# Altium PCB VT 12S RHS V0.1.PcbDoc
Units mm, origin at the board's own origin, x right, y up, seen from the top; angles counter-clockwise.
Board outline 166.65 x 174.65 mm, 2 copper layers (Top Layer, Bottom Layer), stack 0.049 mm thick; 7 components, 6 nets, 19 pads, 36 vias.
Unrouted connection lines stored in the file: 13.
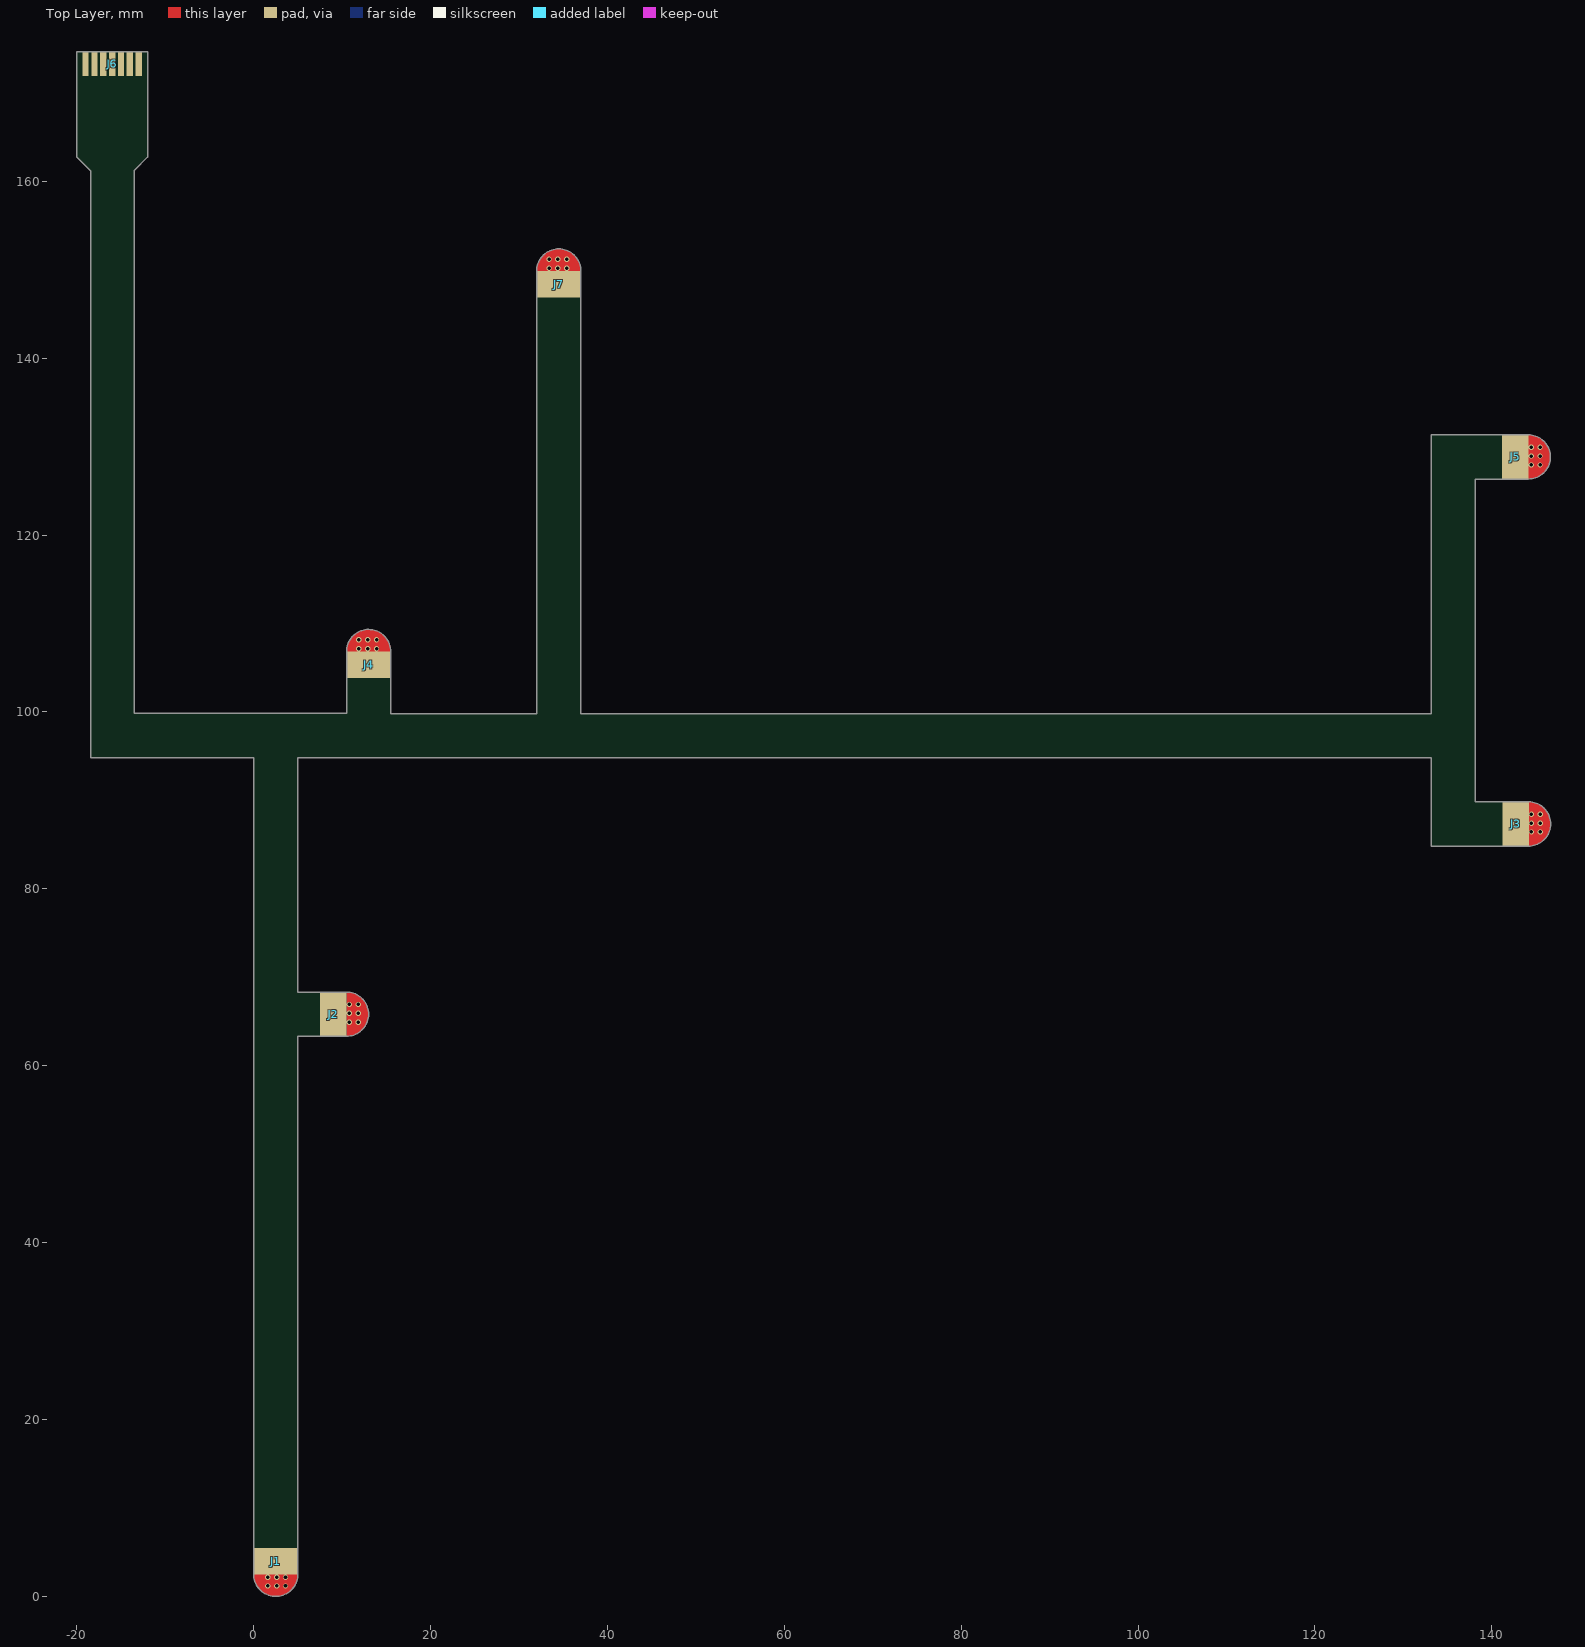
[diagram p0: Top Layer view]
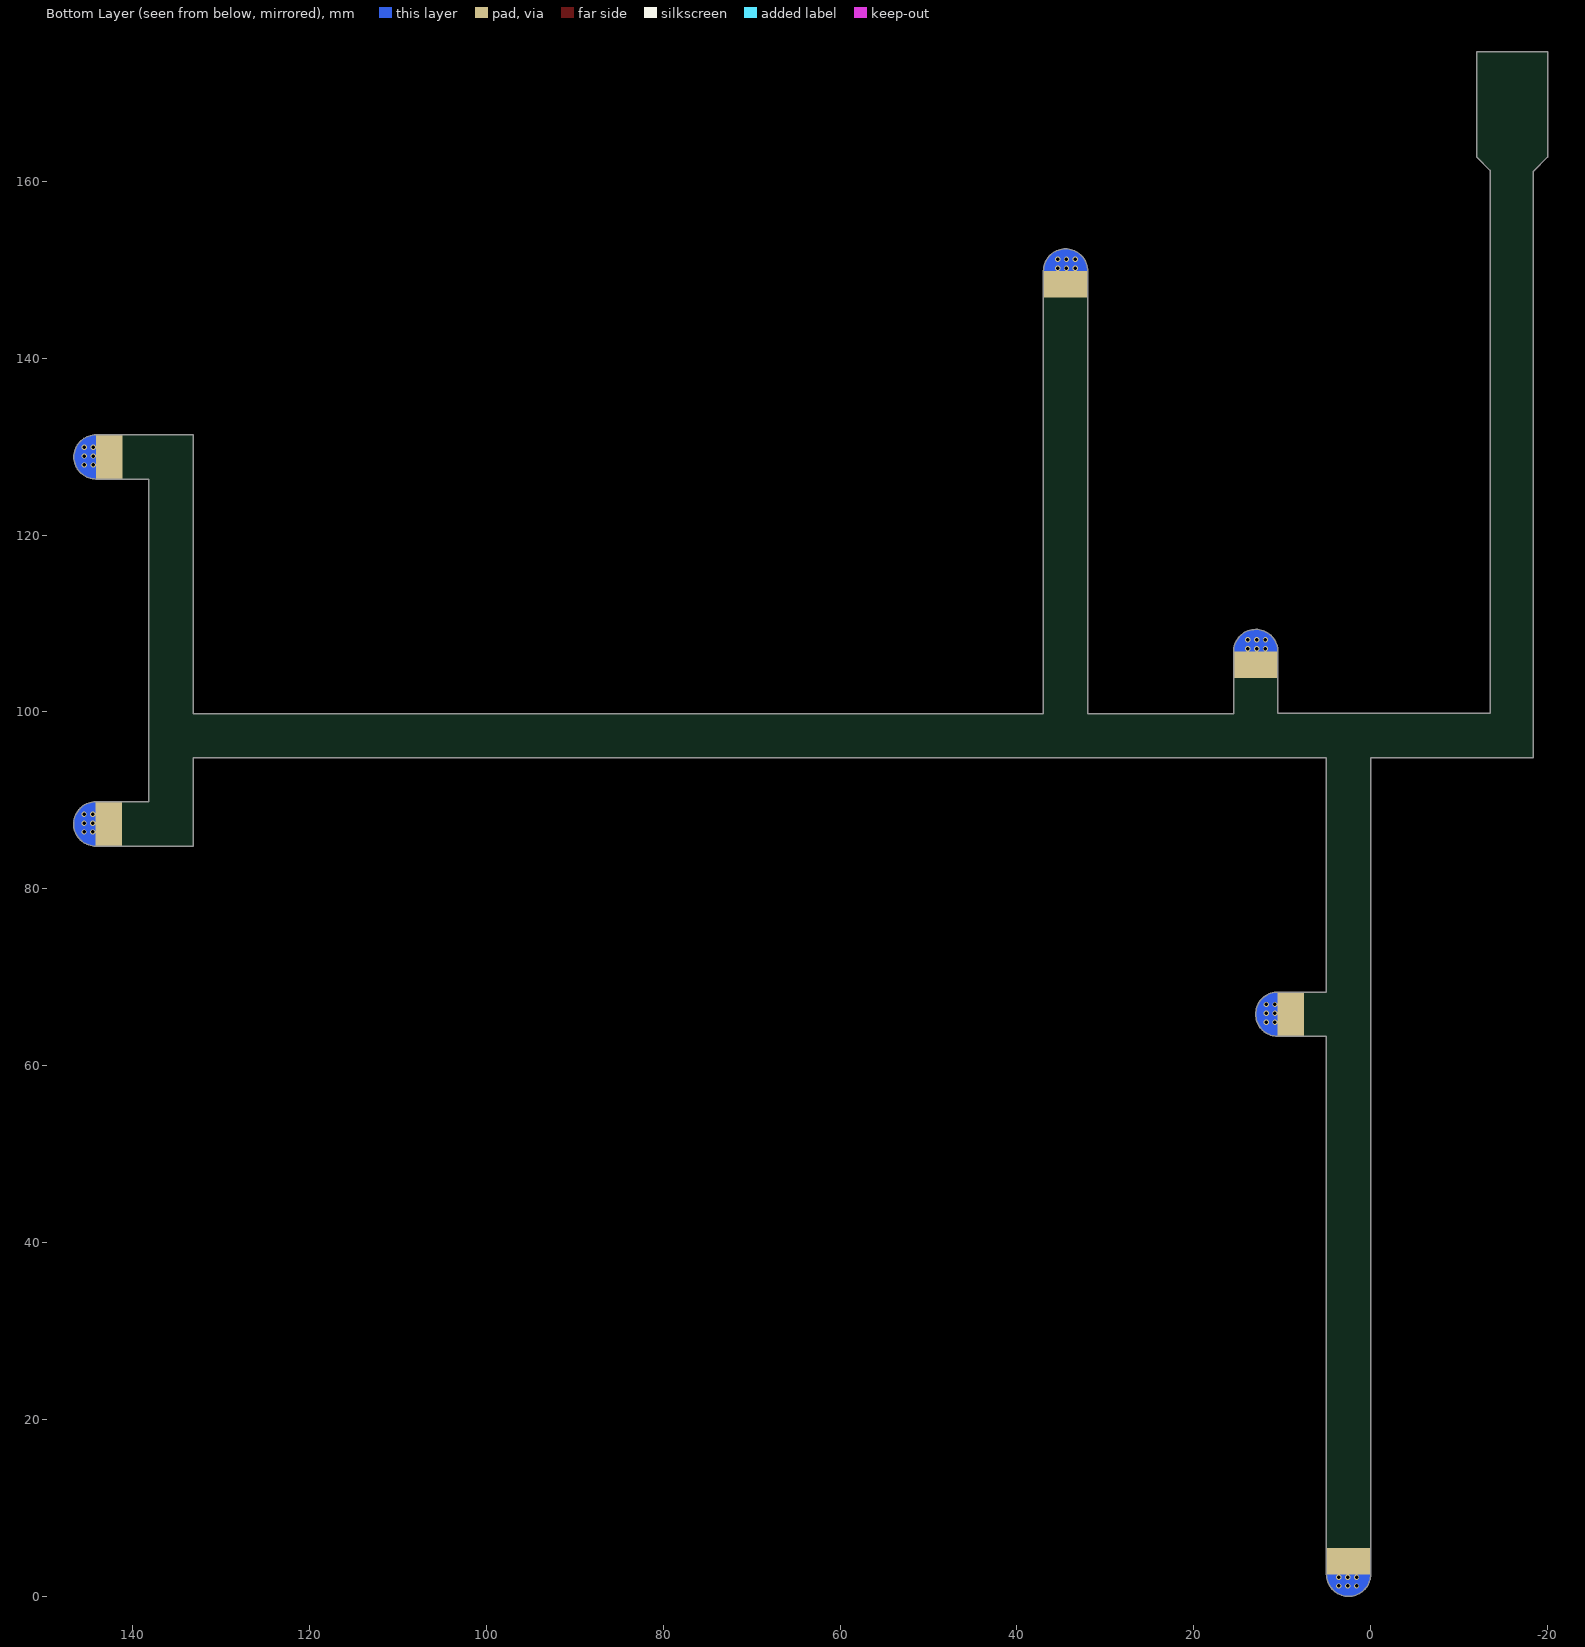
[diagram p1: Bottom Layer view, seen from below]

## Layer stack, top to bottom
Top Solder: solder mask 0.0275, Polyimide, Dk 3.5
Top Layer: signal copper 0.012
Dielectric 1: dielectric 0.025, Polyimide, Dk 3.3
Bottom Layer: signal copper 0.012
Bottom Solder: solder mask 0.0275, Polyimide, Dk 3.5

## Board outline
0,2.5 0,5.475 0,94.82 -18.4,94.82 -18.4,160.9 -18.4,161.125 -20,162.725 -20,174.65 -12,174.65 -12,162.725 -13.5,161.225 -13.5,161.19 -13.5,99.82 10.5,99.82 10.5,106.825 cw(c13,106.825) 13,109.325 cw(c13,106.825) 15.5,106.825 15.5,103.85 15.5,99.8 32,99.8 32,146.875 32,149.85 cw(c34.5,149.85) 34.5,152.35 cw(c34.5,149.85) 37,149.85 37,146.875 37,99.8 133.14,99.8 133.14,131.325 144.125,131.325 cw(c144.125,128.825) 146.625,128.825 cw(c144.125,128.825) 144.125,126.325 138.14,126.325 138.14,89.825 144.15,89.825 cw(c144.15,87.325) 146.65,87.325 cw(c144.15,87.325) 144.15,84.825 133.15,84.825 133.15,94.82 5,94.82 5,68.325 10.5,68.325 cw(c10.5,65.825) 13,65.825 cw(c10.5,65.825) 10.5,63.325 5,63.325 5,5.475 5,2.5 cw(c2.5,2.5) 2.5,0 cw(c2.5,2.5)
board region Flex: -5.225,99.82 10.5,99.82 10.5,106.825 10.5,107.071 10.596,107.554 10.785,108.009 11.058,108.419 11.406,108.767 11.816,109.04 12.271,109.229 12.754,109.325 13,109.325 13.246,109.325 13.729,109.229 14.184,109.04 14.594,108.767 14.942,108.419 15.215,108.009 15.404,107.554 15.5,107.071 15.5,106.825 15.5,103.85 15.5,99.8 32,99.8 32,146.875 32,149.85 32,150.096 32.096,150.579 32.285,151.034 32.558,151.444 32.906,151.792 33.316,152.065 33.771,152.254 34.254,152.35 34.5,152.35 34.746,152.35 35.229,152.254 35.684,152.065 36.094,151.792 36.442,151.444 36.715,151.034 36.904,150.579 37,150.096 37,149.85 37,146.875 37,99.8 133.14,99.8 133.14,131.325 144.125,131.325 144.371,131.325 144.854,131.229 145.309,131.04 145.719,130.767 146.067,130.419 146.34,130.009 146.529,129.554 146.625,129.071 146.625,128.825 146.625,128.579 146.529,128.096 146.34,127.641 146.067,127.231 145.719,126.883 145.309,126.61 144.854,126.421 144.371,126.325 144.125,126.325 138.14,126.325 138.14,89.825 144.15,89.825 144.396,89.825 144.879,89.729 145.334,89.54 145.744,89.267 146.092,88.919 146.365,88.509 146.554,88.054 146.65,87.571 146.65,87.325 146.65,87.079 146.554,86.596 146.365,86.141 146.092,85.731 145.744,85.383 145.334,85.11 144.879,84.921 144.396,84.825 144.15,84.825 133.15,84.825 133.15,94.82 5,94.82 5,68.325 10.5,68.325 10.746,68.325 11.229,68.229 11.684,68.04 12.094,67.767 12.442,67.419 12.715,67.009 12.904,66.554 13,66.071 13,65.825 13,65.579 12.904,65.096 12.715,64.641 12.442,64.231 12.094,63.883 11.684,63.61 11.229,63.421 10.746,63.325 10.5,63.325 5,63.325 5,5.475 5,2.5 5,2.254 4.904,1.771 4.715,1.316 4.442,0.906 4.094,0.558 3.684,0.285 3.229,0.096 2.746,0 2.5,0 2.254,0 1.771,0.096 1.316,0.285 0.906,0.558 0.558,0.906 0.285,1.316 0.096,1.771 0,2.254 0,2.5 0,5.475 0,94.82 -5.225,94.82
board region Anchor: -5.225,94.82 -18.4,94.82 -18.4,160.9 -18.4,161.125 -20,162.725 -20,174.65 -12,174.65 -12,162.725 -13.5,161.225 -13.5,161.19 -13.5,99.82 -5.225,99.82

## Design rules (kind name [scope] priority, off if disabled: settings)
Clearance [All] p1: gap=0.152 ignorepadtopadclearanceinfootprint=FALSE
DiffPairsRouting [All] p1: maxlimit=0.254 minlimit=0.254 mostfreqgap=0.254 toplayer_minwidth=0.381 toplayer_maxwidth=0.381 toplayer_prefwidth=0.381 bottomlayer_minwidth=0.381 bottomlayer_maxwidth=0.381 bottomlayer_prefwidth=0.381 substack1={34D787CE-2DC0-4B00-A6B0-2647A249037B} toplayer_{34d787ce-2dc0-4b00-a6b0-2647a249037b}_minwidth=0.381 toplayer_{34d787ce-2dc0-4b00-a6b0-2647a249037b}_maxwidth=0.381 toplayer_{34d787ce-2dc0-4b00-a6b0-2647a249037b}_prefwidth=0.381 bottomlayer_{34d787ce-2dc0-4b00-a6b0-2647a249037b}_minwidth=0.381 bottomlayer_{34d787ce-2dc0-4b00-a6b0-2647a249037b}_maxwidth=0.381 bottomlayer_{34d787ce-2dc0-4b00-a6b0-2647a249037b}_prefwidth=0.381 maxuncoupledlength=12.7
HoleToHoleClearance [All] p1: gap=0.254 allowstackedmicrovias=FALSE
PolygonConnect [All] p1: connectstyle=Direct reliefconductorwidth=0.254 reliefentries=4 polygonreliefangle="90 Angle" airgapwidth=0.254
RoutingVias [All] p1: holewidth=0.4 width=0.7 viastyle="Through Hole" minholewidth=0.2 minwidth=0.4 maxholewidth=1 maxwidth=1.2
SolderMaskExpansion SolderMaskExpansion_Via [IsVia] p1: expansion=0.102 istentingtop=TRUE
SolderMaskExpansion [All] p2: expansion=0.051 istentingtop=FALSE
Width [All] p1: maxlimit=2.54 minlimit=0.152 preferedwidth=0.254 substack1={34D787CE-2DC0-4B00-A6B0-2647A249037B}
28 further rules are at their usual default settings.

## Components (designator, comment, footprint, x,y, rotation, side; value= is the part's Value field where it differs from the comment)
J1 "Voltage Tap" "Voltage Tap" 2.5,3.975 r90 top
J2 "Voltage Tap" "Voltage Tap" 9.025,65.825 r180 top
J3 "Voltage Tap" "Voltage Tap" 142.675,87.325 r180 top
J4 "Voltage Tap" "Voltage Tap" 13,105.35 r270 top
J5 "Voltage Tap" "Voltage Tap" 142.65,128.825 r180 top
J6 "84953-7-FPC" "84953-7 - FPC" -16,173.275 r0 top
J7 "Voltage Tap" "Voltage Tap" 34.5,148.375 r270 top

## Footprints (in the part's own frame and the unit in brackets; to place one, negate y for a bottom-side part, rotate by r counter-clockwise, add the part's x,y. Pads: shape width x height; smd on the part's side, far side on the other; paste and mask are expansions set on the pad)
"84953-7 - FPC" [mm] "FPC Connectors, Flex-to-Board, 7 Position, .039 in [1 mm] Centerline, FPC Connector, Top Contact"
  rect 0.71x2.7 smd: 1(-3,0) 2(-2,0) 3(-1,0) 4(0,0) 5(1,0) 6(2,0) 7(3,0)
"Voltage Tap" [mm] "Voltage Tap"
  rect 3x5 smd mask+0: 1(0,0)
  rect 3x5 smd far side mask+0: 1(0,0)
  Top Layer region: -1.475,2.5 -1.475,-2.5 -2.56,-2.252 -3.43,-1.559 -3.912,-0.556 -3.912,0.556 -3.43,1.559 -2.56,2.252 -1.475,2.5
  Bottom Layer region: -1.475,2.5 -1.475,-2.5 -2.56,-2.252 -3.43,-1.559 -3.912,-0.556 -3.912,0.556 -3.43,1.559 -2.56,2.252 -1.475,2.5
  Bottom Layer region: -1.475,2.5 -1.475,-2.5 -2.56,-2.252 -3.43,-1.559 -3.912,-0.556 -3.912,0.556 -3.43,1.559 -2.56,2.252 -1.475,2.5

## Part data
J6: "FPC Connectors, Flex-to-Board, 7 Position, .039 in [1 mm] Centerline, FPC Side Connector"

## Via types
v1: diameter 0.6, hole 0.4, Top Layer to Bottom Layer, tented both sides, 36 vias

## Nets (pads, with @x,y where several pads share a name; then routed paths per layer and width w, separated by ;. In a path a pad name is that pad's centre, name@x,y a point inside that pad or via, vN(x,y) a via of type N, cw(c..) or ccw(c..) an arc to the next point about the centre after c; other vN are vias at no path point)
NetJ1_1: J1.1 J6.1
  other v1: 1.6,1.175 2.6,1.175 3.6,1.175 1.6,2.175 2.6,2.175 3.6,2.175
NetJ2_1: J2.1 J6.2
  other v1: 10.825,64.925 11.825,64.925 10.825,65.925 11.825,65.925 10.825,66.925 11.825,66.925
NetJ3_1: J3.1 J6.3
  other v1: 144.475,86.425 145.475,86.425 144.475,87.425 145.475,87.425 144.475,88.425 145.475,88.425
NetJ4_1: J4.1 J6.4
  other v1: 11.9,107.15 12.9,107.15 13.9,107.15 11.9,108.15 12.9,108.15 13.9,108.15
NetJ5_1: J5.1 J6.5
  other v1: 144.45,127.925 145.45,127.925 144.45,128.925 145.45,128.925 144.45,129.925 145.45,129.925
NetJ6_6: J6.6 J6.7 J7.1
  other v1: 33.4,150.175 34.4,150.175 35.4,150.175 33.4,151.175 34.4,151.175 35.4,151.175

## Silkscreen, mask and mechanical layers (free items; w line width, h text height)
Board Shape:
  lines w0.05: 0,5.475 0,94.82 -18.4,94.82 -18.4,160.9 -18.4,161.125 -18.485,161.21 -20,162.725 -20,174.65 -12,174.65 -12,162.725 -13.275,161.45 -13.5,161.225 -13.5,161.19 -13.5,99.82 10.5,99.82 10.5,103.85 ; 5,5.475 5,63.325 7.525,63.325 ; 7.525,68.325 5,68.325 5,94.82 133.15,94.82 133.15,84.825 141.175,84.825 ; 15.5,103.85 15.5,99.8 32,99.8 32,146.875 ; 37,146.875 37,99.8 133.14,99.8 133.14,131.325 ; 141.15,126.325 138.14,126.325 ; 141.15,131.325 133.14,131.325 ; 141.175,89.825 138.14,89.825 138.14,126.325 ; 133.14,131.325 133.14,131.325 ; 138.14,126.325 138.14,126.325
Mechanical Colab:
  lines w0.013: 0,0 0,94.82 -18.5,94.82 -18.5,172.32 -13.5,172.32 -13.5,99.82 10.5,99.82 10.5,109.32 15.5,109.32 15.5,99.82 32,99.82 32,152.32 37,152.32 37,99.82 133.14,99.82 133.14,131.32 146.64,131.32 146.64,126.32 138.14,126.32 138.14,89.82 146.64,89.82 146.64,84.82 133.14,84.82 133.14,94.82 5,94.82 5,68.32 13,68.32 ; 0,42.1 5,42.1 ; 0,45.32 5,45.32 ; 5,0 5,63.32 13,63.32 ; 13,63.37 13,68.37 ; 53.5,94.82 53.5,99.82 ; 56.72,94.82 56.72,99.82 ; 127.42,94.82 127.42,99.82 ; 130.64,94.82 130.64,99.82

## Text inside footprints (layer, text, board x,y; h text height)
J6: Stiffener Backing "Total FPC width on stiffener / 0.3mm +- 0.05mm" at -20.975,175.075 h1